# Altium PCB ChassisPowerDistroA_PSoC_1.0_GK.PcbDoc (part 2 of 2)
Units mil, origin at the board's own origin, x right, y up, seen from the top; angles counter-clockwise.
Board outline 6000 x 4000 mil, 4 copper layers (Top Layer, Int1 (GND), Int2 (PWR), Bottom Layer), stack 53.912 mil thick; 194 components, 92 nets, 571 pads, 130 vias.
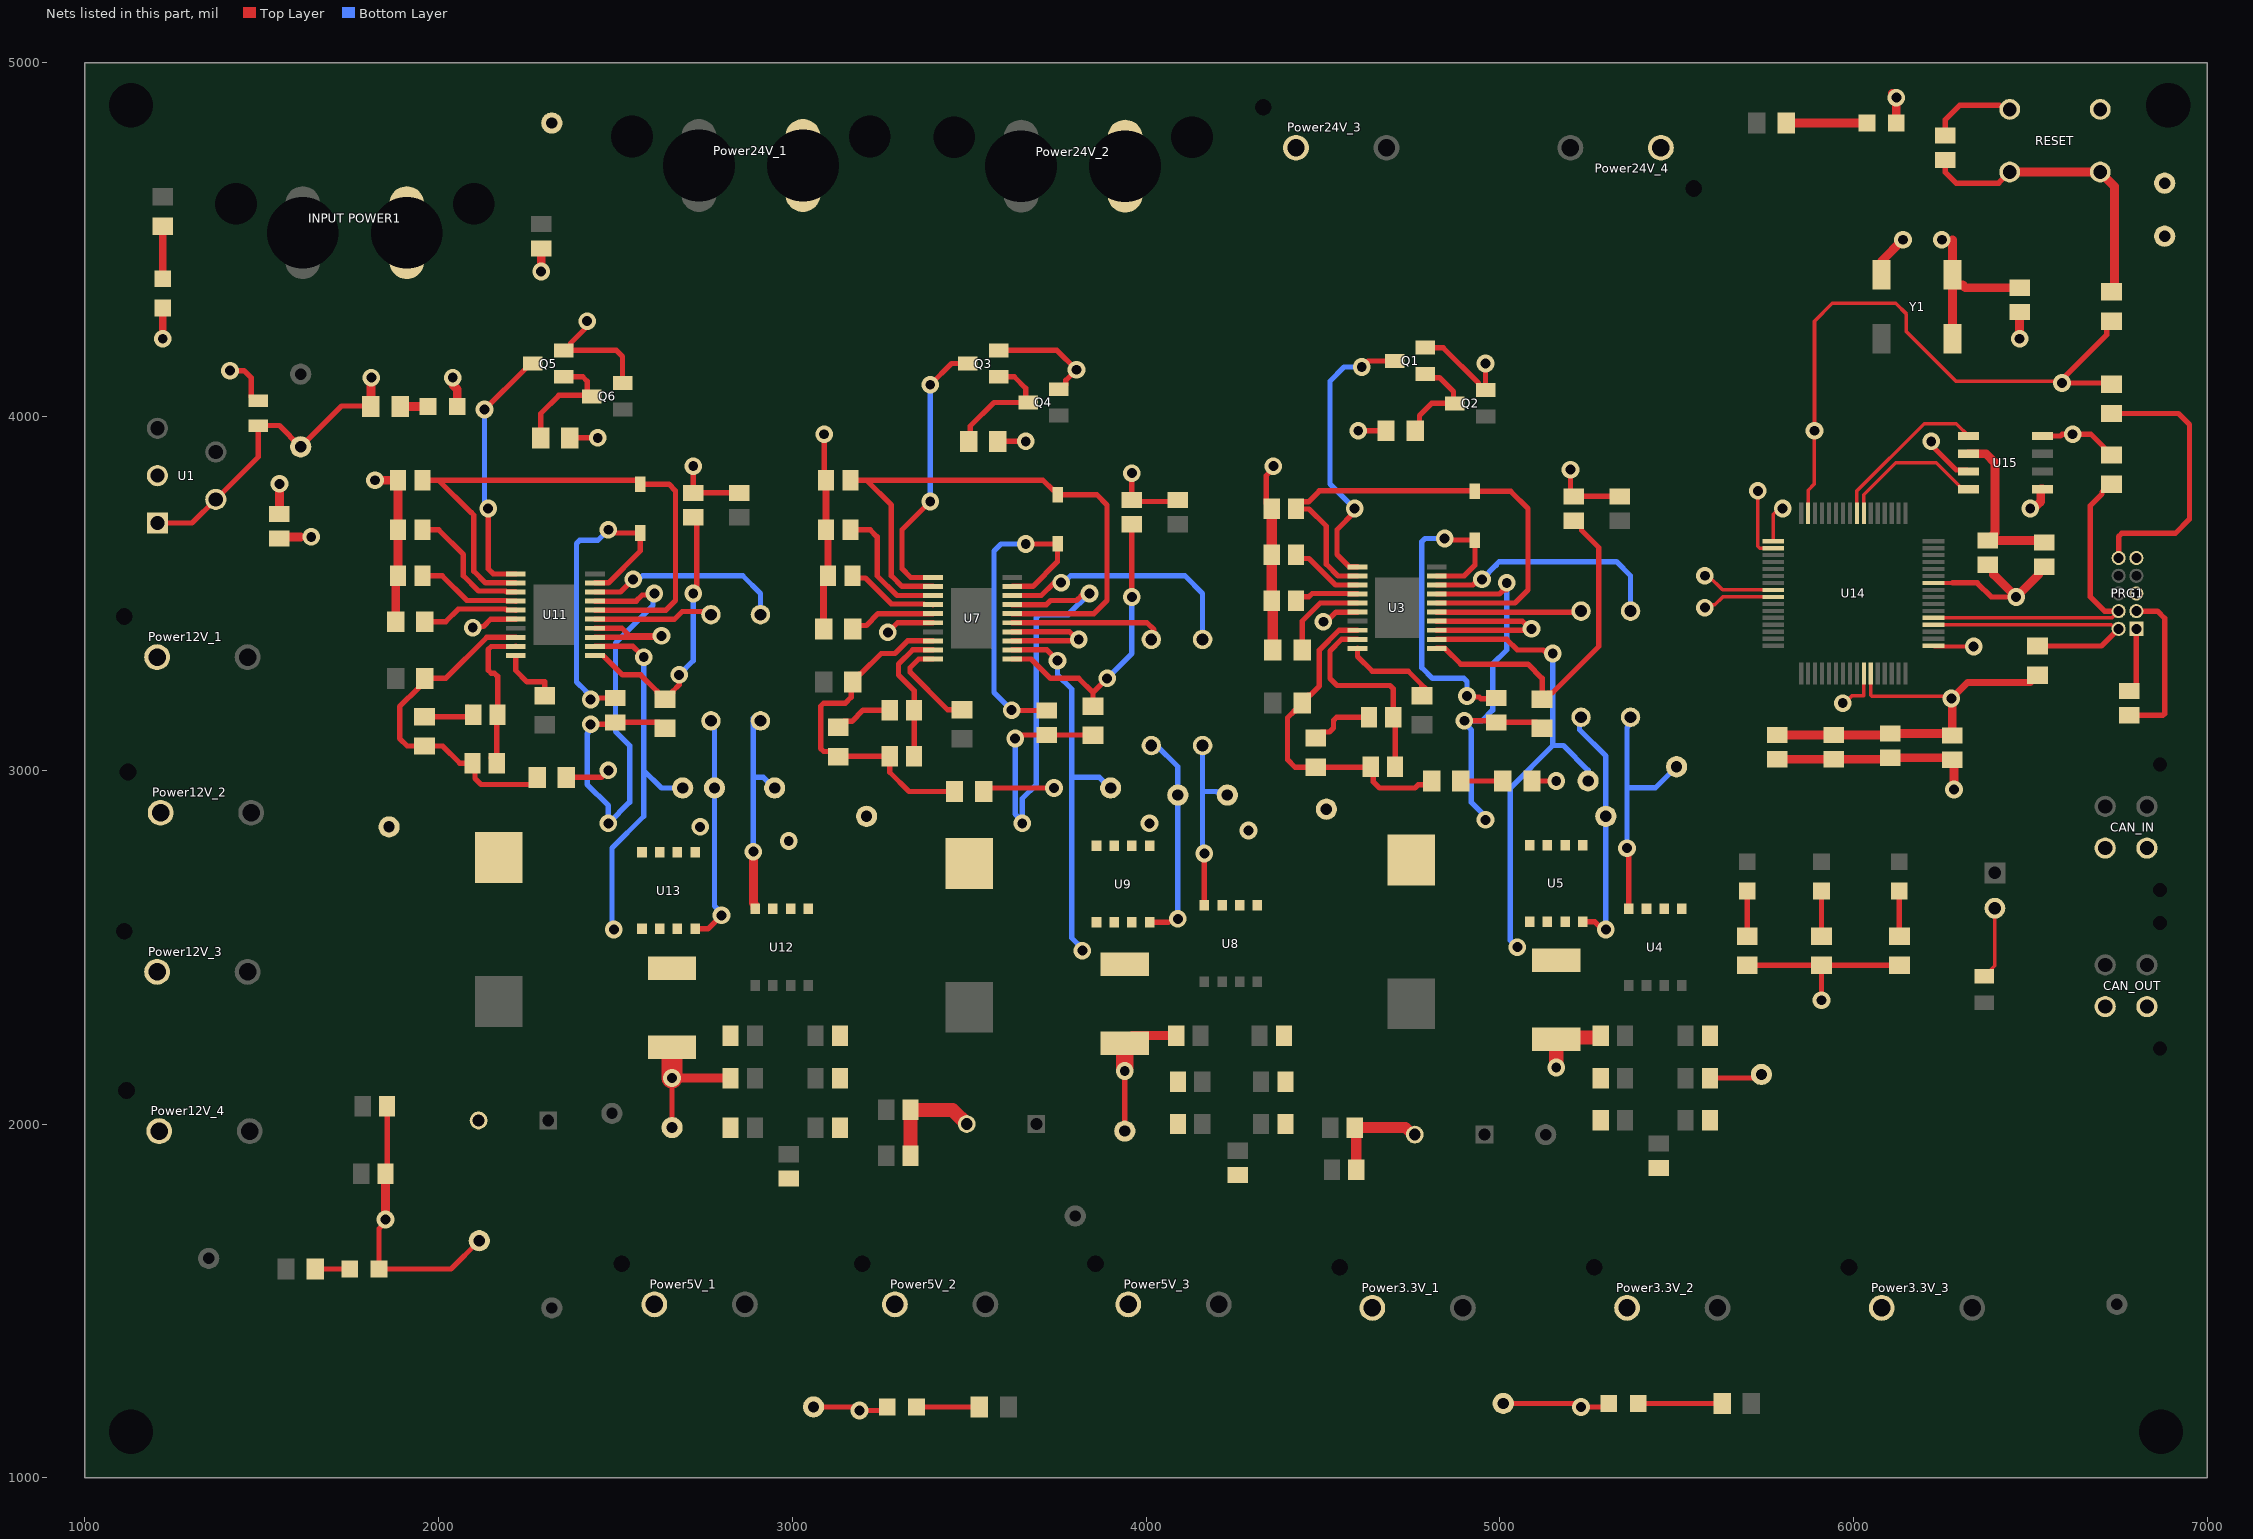
[diagram p4: the nets of this part, all layers, seen from the top]

## Via types
v1: diameter 50, hole 28, Top Layer to Bottom Layer, 130 vias

## Nets (pads, with @x,y where several pads share a name; then routed paths per layer and width w, separated by ;. In a path a pad name is that pad's centre, name@x,y a point inside that pad or via, vN(x,y) a via of type N, cw(c..) or ccw(c..) an arc to the next point about the centre after c; other vN are vias at no path point) (continued)
GND: 3.3V_Power.NEG 5V_Power.NEG 12V_Power.NEG 24V_OUT.NEG "INPUT POWER1.2" C1.1 C2.1 C4.1 C5.1 C6.1 C7.1 C8.1 C9.1 C10.1 C11.2 C12.1 C13.1 C14.1 C15.1 C16.1 C17.1 C20.1 C22.1 C23.1 C24.1 C25.1 C26.1 C27.1 C28.1 C29.2 C30.1 C31.1 C32.1 C33.1 C34.1 C35.1 C38.1 C40.1 C41.1 C42.1 C43.1 C44.1 C45.1 C46.1 C47.2 C48.1 C49.1 C50.1 C51.1 C52.1 C53.1 C56.2 C57.2 C58.2 C59.2 C60.1 C65.1 C66.1 C67.1 CAN_IN.1 CAN_OUT.1 GND.1 IN_P.NEG LP.NEG Power3.3V_1.2 Power3.3V_2.2 Power3.3V_3.2 Power5V_1.2 Power5V_2.2 Power5V_3.2 Power12V_1.2 Power12V_2.2 Power12V_3.2 Power12V_4.2 Power24V_1.2 Power24V_2.2 Power24V_3.2 Power24V_4.2 PRG1.3 PRG1.5 PRG1.9 Q1.2 Q2.2 Q3.2 Q4.2 Q5.2 Q6.2 R8.1 R10.1 R11.1 R19.1 R21.1 R22.1 R30.1 R32.1 R33.1 R44.2 RESET.1 RESET.2 TP10.1 TP11.1 TP21.1 TP22.1 TP32.1 TP33.1 TP37.1 U1.3 U3.6 U3.13 U3.14 U7.6 U7.13 U7.14 U11.6 U11.13 U11.14 U14.10 U14.17 U14.49 U14.57 U15.8 Y1.2 | length 10947.1
  Top Layer w5: v1(5580,3460) v1@5587.98,3467.98 ; U14.17@6226.38,3352.36 U14.17@6228.74,3350 ; RESET.1@6431.72,4878.91 RESET.1@6442.05,4868.58 ; 6875.55,3155.55 6880,3160
  Top Layer w10: v1@5587.98,3467.98 5607.98,3467.98 5630.16,3490.16 U14.57@5773.62,3490.16 ; U14.49@5773.62,3647.64 5773.62,3723.62 5800,3750 v1(5800,3740) ; v1(5970,3190) 5975.39,3190 5995.86,3210.47 6029.53,3210.47 U14.10@6029.53,3273.62 ; U14.17@6228.74,3350 v1(6340,3350)
  Top Layer w15: v1(1850,1730) 1850,1722.37 1831.34,1703.71 12V_Power.NEG@1831.34,1590 2035,1590 TP22.1@2115,1670 ; C49.1@1850,1860 1854.45,1864.45 C48.1@1854.45,2030 ; v1(2096.65,3403.35) 2093.3,3406.7 2126.7,3406.7 2147.2,3427.2 U11.6@2218,3427.2 ; Q5.2@2353.31,4187.4 Q5.2@2361.18,4187.4 ; R30.1@2361.34,2980 2460,2980 v1(2480,3000) ; v1(2420,4270) 2420,4254.09 2373.37,4207.46 2373.37,4199.59 Q5.2@2361.18,4187.4 ; U11.13@2442,3376.02 v1@2626.02,3376.02 ; U11.14@2442,3401.61 2518.39,3401.61 2540,3380 v1(2630,3380) ; Q6.2@2520,4094.8 2520,4170 2502.6,4187.4 Q5.2@2361.18,4187.4 ; TP32.1@2660,1990 v1(2660,2130) ; C50.1@2720,3784.45 v1(2720,3860) ; C50.1@2730,3784.45 C53.1@2850,3784.45 C53.1@2860,3784.45 ; TP11.1@3060,1200 3170.53,1200 3180.53,1190 v1(3190,1190) 3258.66,1190 5V_Power.NEG@3268.66,1200 ; C34.1@3088.66,3537.56 C34.1@3101.1,3550 ; v1(3090,3950) 3090,3825.55 C20.1@3095.55,3820 ; C33.1@3095.55,3680 C33.1@3101.1,3674.45 ; v1(3270,3390) 3297.2,3417.2 U7.6@3398,3417.2 ; R19.1@3541.34,2940 3551.34,2950 v1(3740,2950) ; Q3.2@3583.31,4187.4 3748.5,4187.4 v1(3803.31,4132.6) ; U7.13@3622,3366.02 3806.02,3366.02 v1(3810,3370) 3805.33,3370 3783.71,3391.61 U7.14@3622,3391.61 ; Q4.2@3753.31,4077.4 3761.18,4077.4 3773.37,4089.59 3773.37,4102.66 v1@3793.31,4122.6 ; TP21.1@3940,1980 v1(3940,2150) ; R22.1@3940,2228.54 R22.1@3961.46,2250 ; v1(3960,3840) C30.1@3960,3764.45 3964.45,3760 C35.1@4090,3760 ; C15.1@4355.55,3480 C15.1@4358.66,3476.89 ; C2.1@4355.55,3740 4340.22,3755.33 4340.22,3770.01 4340,3770.22 4340,3833.71 4360,3853.71 v1(4360,3860) ; v1(4501.56,3420) 4503.11,3420 4510,3426.89 4513.59,3423.3 4537.49,3447.2 U3.6@4598,3447.2 ; C13.1@4590,1990 C13.1@4594.45,1985.55 ; C11.2@4753.61,1970 C11.2@4760,1970 ; Q1.2@4790,4194.8 4840,4194.8 4939.94,4094.86 4939.94,4086.99 4952.13,4074.8 Q2.2@4960,4074.8 v1@4960,4130 ; U3.13@4822,3396.02 5086.02,3396.02 v1(5090,3400) 5085.33,3400 5063.71,3421.61 U3.14@4822,3421.61 ; TP33.1@5010,1210 5210.53,1210 5220.53,1200 v1(5230,1200) 5298.66,1200 3.3V_Power.NEG@5308.66,1210 ; R8.1@5091.34,2970 v1(5160,2970) ; v1(5200,3850) 5200,3784.45 C12.1@5210,3774.45 C17.1@5340,3774.45 ; C10.1@5445.55,1880 C10.1@5450,1875.55 ; C8.1@5594.45,2130 5717.82,2130 5727.82,2140 TP10.1@5740,2140 ; C67.1@6260,4794.45 6260,4840 6300,4880 6412.13,4880 ; U15.8@6534.33,3945 6585,3945 6590,3950 v1(6620,3950) 6671.34,3950 6707.97,3913.37 6707.97,3908.44 6725.08,3891.34 R44.2@6730,3891.34 ; C65.1@6780,3155.55 6875.55,3155.55 ; PRG1.3@6800,3450 6860,3450 6880,3430 6880,3160
  Top Layer w20: v1(1220,4220) IN_P.NEG@1220,4307.32 ; R21.1@3088.66,3400 C34.1@3088.66,3537.56 ; C33.1@3095.55,3680 C20.1@3095.55,3820 ; C34.1@3101.1,3550 C33.1@3101.1,3674.45
  Top Layer w25: C1.1@1550,3724.45 v1@1550,3790 ; v1(1820,3820) C38.1@1885.55,3820 C51.1@1885.55,3680 C52.1@1885.55,3550 1878.66,3543.11 R33.1@1878.66,3420 ; v1(1850,1730) C49.1@1850,1860 ; v1(2040,4110) 2040,4090 2052.68,4077.32 LP.NEG@2052.68,4028.66 ; v1(2290,4410) C66.1@2290,4475.55 ; v1@2626.02,3376.02 v1(2630,3380) ; v1(2660,2130) C41.1@2825.55,2130 ; R22.1@3961.46,2250 C22.1@4085.55,2250 ; C59.2@5784.45,3031.1 C58.2@5944.45,3031.1 6100,3031.1 C57.2@6104.45,3035.55 6273.66,3035.55 C56.2@6279.45,3029.76 6274.45,3024.76 6284.45,3014.76 v1(6284.45,2945.55) ; Y1.2@6080,4401.1 6080,4440 v1(6140,4500) ; v1@6110,4913.24 v1(6121.34,4901.9) 24V_OUT.NEG@6121.34,4830 ; v1(6470,4220) C60.1@6470,4295.55
  Top Layer w30: C15.1@4355.55,3480 C16.1@4355.55,3610 C2.1@4355.55,3740 ; R10.1@4358.66,3340 C15.1@4358.66,3476.89 ; C13.1@4590,1990 4733.61,1990 C11.2@4753.61,1970 ; C14.1@4594.45,1870 C13.1@4594.45,1985.55
  Top Layer w40: C32.1@3334.45,1910 C31.1@3334.45,2040 3453.15,2040 C29.2@3493.15,2000 ; v1@5160,2170 R11.1@5160,2240 5165,2245 5282.72,2245 5285.55,2247.83 C4.1@5285.55,2250
  Top Layer w50: v1@3940,2159.67 R22.1@3940,2228.54
  Top Layer w60: v1(2660,2130) R32.1@2660,2217.09
  other v1: 5160,2160 1550,3810 4960,4150
Net3.3V_Power_POS: 3.3V_Power.POS R13.1 | length 237.3
  Top Layer w15: 3.3V_Power.POS@5391.34,1210 R13.1@5628.66,1210
Net5V_OUT_1: 5V_OUT.1 C1.2 F?.2 R1.2 U1.1 U1.2 | length 986.9
  Top Layer w15: U1.1@1205,3699 1303,3699 U1.2@1370,3766 1490,3886 F?.2@1490,3974.75 1549.86,3974.75 5V_OUT.1@1610,3914.61 1725.39,4030 1807.32,4030 R1.2@1808.66,4028.66
  Top Layer w25: C1.2@1550,3655.55 1554.45,3660 1610,3660 ; R1.2@1808.66,4028.66 1808.66,4108.66 v1(1810,4110)
  other v1: 1640,3660
Net5V_Power_POS: 5V_Power.POS R24.1 | length 177.3
  Top Layer w15: 5V_Power.POS@3351.34,1200 R24.1@3528.66,1200
Net12V_Power_POS: 12V_Power.POS R35.1 | length 97.3
  Top Layer w15: R35.1@1651.34,1590 12V_Power.POS@1748.66,1590
Net24V_OUT_POS: 24V_OUT.POS R36.1 | length 228.7
  Top Layer w25: R36.1@5810,4830 24V_OUT.POS@6038.66,4830
NetC2_2: C2.2 U2.2 U3.2 U3.16 | length 1517.9
  Top Layer w15: U3.2@4598,3549.57 4542.96,3549.57 4510,3582.53 4510,3690 4461,3739 4425.45,3739 C2.2@4424.45,3740 4424.45,3743.69 4439.78,3759.02 4459.02,3759.02 4490,3790 4929,3790 U2.2@4930,3789 5031,3789 5080,3740 5080,3510 5042.8,3472.8 U3.16@4822,3472.8
NetC3_1: C3.1 L1.2 R5.2 TP7.1 U3.17 U4.1 U4.2 U4.3 U5.5 U5.6 U5.7 U5.8 | length 1225.2
  Top Layer w15: U3.17@4822,3498.39 4998.91,3498.39 5010.53,3510 5019.5,3510 5020,3510.5 v1(5020,3530) ; v1(4900,3140) 4985.55,3140 C3.1@4990,3135.55 5103.11,3135.55 R5.2@5120,3118.66
  Bottom Layer w15: v1(4960,2860) 4960,2869.47 4920,2909.47 4920,3113.71 4900,3133.71 v1(4900,3140) 4950,3140 4980,3170 4980,3300 5020,3340 v1(5020,3530)
NetC3_2: C3.2 U2.1 U3.19 | length 981.7
  Top Layer w15: U3.19@4822,3549.57 4899.57,3549.57 4930,3580 U2.1@4930,3651 4849,3651 v1(4844.5,3655.5) v1@4840,3660 ; v1(4907.5,3210) 4910.1,3207.4 4942.07,3207.4 4947.35,3202.12 4987.67,3202.12 C3.2@4990,3204.45
  Bottom Layer w15: v1(4844.5,3655.5) 4788.79,3655.5 4780,3646.71 4780,3290 4810,3260 4898.71,3260 4907.5,3251.21 v1(4907.5,3210)
NetC12_2: C12.2 R5.1 U3.11 | length 1001.5
  Top Layer w15: U3.11@4822,3344.84 4845.16,3344.84 4890,3300 5080,3300 5120,3260 R5.1@5120,3201.34 5137.11,3218.44 5148.44,3218.44 5280,3350 5280,3630 5231.44,3678.56 5231.44,3690.22 5216.1,3705.55 C12.2@5210,3705.55
NetC15_2: C15.2 U3.4 | length 182.5
  Top Layer w15: C15.2@4424.45,3480 4435.45,3491 4461,3491 4470,3500 4571.29,3500 4572.4,3498.89 4597.5,3498.89 U3.4@4598,3498.39
NetC16_2: C16.2 U3.3 | length 209.2
  Top Layer w15: C16.2@4424.45,3610 4435.45,3599 4461,3599 4536.02,3523.98 U3.3@4598,3523.98
NetC18_1: C18.1 R6.1 R7.2 R12.1 U3.8 | length 979.1
  Top Layer w15: R12.1@4502.03,2991.56 R12.1@4484.92,3008.66 ; U3.8@4598,3396.02 4546.02,3396.02 4490,3340 4490,3238.66 4463.37,3212.03 4458.44,3212.03 4441.34,3194.92 R6.1@4441.34,3190 4441.34,3185.08 4424.23,3167.97 4419.31,3167.97 4400,3148.66 4400,3030 4421.34,3008.66 R12.1@4480,3008.66 R12.1@4484.92,3008.66 ; R7.2@4807.32,2970 4796.33,2959 4769,2959 4760,2950 4660,2950 4642.65,2967.35 4642.65,3002.9 C18.1@4635.55,3010 4634.21,3008.66 R12.1@4484.92,3008.66
NetC18_2: C18.2 C19.2 U3.9 | length 597.4
  Top Layer w15: U3.9@4598,3370.43 4552.96,3370.43 4520,3337.47 4520,3260 4540,3240 4690.11,3240 4698.9,3231.21 4698.9,3171.44 4685.89,3171.44 4684.72,3170.28 4684.72,3151.16 C19.2@4683.56,3150 ; C19.2@4698.9,3150 4704.45,3144.45 C18.2@4704.45,3010
NetC19_1: C19.1 R12.2 | length 186.7
  Top Layer w15: R12.2@4480,3091.34 4497.11,3108.44 4518.44,3108.44 4530,3120 4530,3141.21 4538.79,3150 C19.1@4630,3150
NetC20_2: C20.2 U6.2 U7.2 U7.16 | length 1741.7
  Top Layer w15: C20.2@3164.45,3820 3210,3820 ; U7.2@3398,3519.57 3397.57,3520 3310,3520 3280,3550 3280,3750 3210,3820 ; U7.16@3622,3442.8 3852.8,3442.8 3890,3480 3890,3750 3861,3779 U6.2@3750,3779 3750,3786 3742.5,3793.5 3735.5,3793.5 3709,3820 3210,3820
NetC21_1: C21.1 L2.2 R17.2 TP18.1 U7.17 U8.1 U8.2 U8.3 U9.5 U9.6 U9.7 U9.8 | length 1474.1
  Top Layer w15: U7.17@3622,3468.39 3718.39,3468.39 3730,3480 3803.71,3480 3817.02,3493.3 3833.3,3493.3 v1(3840,3500) ; v1(3630,3090) 3640,3100 C21.1@3720,3100 3848.66,3100 R17.2@3850,3098.66
  Bottom Layer w15: v1(3630,3090) 3630,2876.29 v1@3650,2856.29 ; v1(3650,2850) v1@3650,2856.29 ; v1(3840,3500) 3780,3440 3698.79,3440 3690,3431.21 3690,2960 3650,2920 v1@3650,2856.29
  other v1: 4290,2830 4010,2850
NetC21_2: C21.2 U6.1 U7.19 | length 965.6
  Top Layer w15: v1@3620,3168.9 C21.2@3720,3168.9 ; U7.19@3622,3519.57 3622.43,3520 3680,3520 3750,3590 3750,3639 3749,3640 v1(3660,3640)
  Bottom Layer w15: v1(3620,3170) 3570,3220 3570,3620 3590,3640 v1(3660,3640)
NetC30_2: C30.2 R17.1 U7.11 | length 827.1
  Top Layer w15: U7.11@3622,3314.84 3675.16,3314.84 3730,3260 3810,3260 3850,3220 ; R17.1@3850,3181.34 3850,3220 ; v1(3890,3260) 3850,3220 ; v1(3960,3490) C30.2@3960,3695.55
  Bottom Layer w15: v1(3890,3260) 3960,3330 v1(3960,3490)
NetC33_2: C33.2 U7.3 | length 375
  Top Layer w15: C33.2@3164.45,3680 3220,3680 3240,3660 3240,3550 3296.02,3493.98 U7.3@3398,3493.98
NetC34_2: C34.2 U7.4 | length 261.8
  Top Layer w15: C34.2@3170,3550 3176.55,3543.45 3206.55,3543.45 3280,3470 3371.29,3470 3372.4,3468.89 3397.5,3468.89 U7.4@3398,3468.39
NetC36_1: C36.1 R23.2 | length 165.7
  Top Layer w15: R23.2@3130,3121.34 3147.11,3138.44 3168.44,3138.44 3200,3170 C36.1@3275.55,3170
NetC36_2: C36.2 C37.2 U7.9 | length 393.2
  Top Layer w15: C37.2@3344.45,3040 C36.2@3344.45,3170 3344.45,3225.55 3300,3270 3300,3300 3340.43,3340.43 U7.9@3398,3340.43
NetC37_1: C37.1 R18.1 R19.2 R23.1 U7.8 | length 996.2
  Top Layer w15: U7.8@3398,3366.02 3326.02,3366.02 3290,3330 3251.34,3330 3193.37,3272.03 3188.44,3272.03 3166.76,3250.34 3166.76,3206.76 3150,3190 3088.79,3190 3080,3181.21 3080,3062.19 3088.79,3053.4 3115.26,3053.4 R23.1@3130,3038.66 3131.34,3040 C37.1@3275.55,3040 3275.55,2994.45 3330,2940 R19.2@3458.66,2940
NetC38_2: C38.2 U10.2 U11.2 U11.16 | length 1708.5
  Top Layer w15: C38.2@1954.45,3820 2000,3820 ; U11.2@2218,3529.57 2217.57,3530 2132.53,3530 2099.5,3563.03 2099.5,3721.71 2091.21,3730 2090,3730 2000,3820 ; U11.16@2442,3452.8 2642.8,3452.8 2670,3480 2670,3790 2651,3809 U10.2@2570,3809 2559,3820 2000,3820
NetC39_1: C39.1 L3.2 R28.2 TP29.1 U11.17 U12.1 U12.2 U12.3 U13.5 U13.6 U13.7 U13.8 | length 1422.2
  Top Layer w15: U11.17@2442,3478.39 2558.39,3478.39 2575.81,3495.81 v1@2605.81,3495.81 ; v1@2450,3130 2450.37,3130.37 C39.1@2494.82,3130.37 ; C39.1@2500,3135.55 2623.11,3135.55 R28.2@2640,3118.66
  Top Layer w25: C39.1@2494.82,3130.37 C39.1@2500,3135.55 ; v1@2605.81,3495.81 v1(2610,3500)
  Bottom Layer w15: v1(2430,3130) 2423.3,3123.3 2423.3,3107.02 2420,3103.71 2420,2960 2480,2900 v1(2480,2850) 2540,2910 2540,3070 2500,3110 2500,3360 2606.41,3466.41 2606.41,3496.41 v1(2610,3500)
  other v1: 2990,2800 2739.5,2840
NetC39_2: C39.2 U10.1 U11.19 | length 946.7
  Top Layer w15: v1(2430,3200) 2430,3190 2444.45,3204.45 C39.2@2500,3204.45 ; U11.19@2442,3529.57 2442.43,3530 2480,3530 2570,3620 U10.1@2570,3671 2491,3671 v1@2490,3670
  Bottom Layer w15: v1(2430,3200) 2430,3209.47 2416.41,3223.06 2416.41,3223.59 2390,3250 2390,3641.21 2398.79,3650 2450,3650 v1(2480,3680)
NetC50_2: C50.2 R28.1 U11.11 | length 802.3
  Top Layer w15: U11.11@2442,3324.84 2465.16,3324.84 2520,3270 2571.34,3270 2617.97,3223.37 2617.97,3218.44 2635.08,3201.34 R28.1@2640,3201.34 2644.92,3201.34 2662.03,3218.44 2662.03,3223.37 2680,3241.34 v1(2680,3270) ; v1@2730,3500 C50.2@2730,3715.55
  Bottom Layer w15: v1(2680,3270) 2720,3310 v1(2720,3500)
NetC51_2: C51.2 U11.3 | length 371.6
  Top Layer w15: C51.2@1954.45,3680 2000,3680 2070,3610 2070,3550 2113,3507 2189.88,3507 2192.4,3504.48 2217.5,3504.48 U11.3@2218,3503.98
NetC52_2: C52.2 U11.4 | length 293.2
  Top Layer w15: C52.2@1954.45,3550 2010,3550 2080,3480 2191.29,3480 2192.4,3478.89 2217.5,3478.89 U11.4@2218,3478.39
NetC54_1: C54.1 R34.2 | length 168.4
  Top Layer w15: R34.2@1960,3151.34 2091.85,3151.34 C54.1@2098.03,3157.52 2098.03,3163.62 C54.1@2082.7,3178.96
NetC54_2: C54.2 C55.2 U11.9 | length 442.3
  Top Layer w15: C55.2@2149.11,3035.33 C55.2@2164.45,3020 2164.45,3155.04 C54.2@2166.93,3157.52 2166.93,3265.58 2158.06,3274.45 2148.79,3274.45 2140,3283.24 2140,3341.21 2148.79,3350 2217.57,3350 U11.9@2218,3350.43
NetC55_1: C55.1 R29.1 R30.2 R34.1 U11.8 | length 994.4
  Top Layer w15: R34.1@1948.1,3056.76 R34.1@1960,3068.66 ; R29.1@1960,3258.66 1944.23,3242.89 1944.23,3234.23 1890,3180 1890,3090 1911.34,3068.66 R34.1@1960,3068.66 ; R29.1@1961.34,3260 2020,3260 2136.02,3376.02 U11.8@2218,3376.02 ; R30.2@2278.66,2980 2278.66,2977.11 2261.56,2960 2120,2960 2102.65,2977.35 2102.65,3012.9 C55.1@2095.55,3020 2060,3020 2011.34,3068.66 R34.1@1960,3068.66
  Top Layer w25: R29.1@1960,3258.66 R29.1@1961.34,3260
NetC61_1: C61.1 C62.1 U15.2 | length 472.7
  Top Layer w25: U15.2@6325.67,3895 6375,3895 6400,3870 6400,3670 6396.44,3666.44 6396.44,3660.33 C62.1@6386.1,3650 ; C62.1@6380,3650 C62.1@6386.1,3650 ; C61.1@6540,3644.45 6534.45,3650 C62.1@6386.1,3650
NetC67_2: C67.2 R38.1 RESET.3 RESET.4 | length 857.5
  Top Layer w5: R38.1@6730,4352.68 R38.1@6737.95,4360.63
  Top Layer w15: C67.2@6260,4725.55 6260,4690 6290,4660 6410.63,4660 RESET.3@6442.05,4691.42
  Top Layer w25: RESET.3@6442.05,4691.42 RESET.4@6697.95,4691.42 6737.95,4651.42 R38.1@6737.95,4360.63
NetFLT_3.3V_POS: FLT_3.3V.POS R39.1 | length 126
  Top Layer w15: R39.1@6130,2532.68 FLT_3.3V.POS@6130,2658.66
NetFLT_5V_POS: FLT_5V.POS R40.1 | length 127.3
  Top Layer w15: R40.1@5910,2531.34 FLT_5V.POS@5910,2658.66
NetFLT_12V_POS: FLT_12V.POS R41.1 | length 131.5
  Top Layer w15: FLT_12V.POS@5700,2658.66 5700,2541.34 R41.1@5710,2531.34
NetIN_P_POS: IN_P.POS R37.1 | length 148.7
  Top Layer w20: IN_P.POS@1220,4390 R37.1@1220,4538.66
NetLP_POS: LP.POS R1.1 | length 78.7
  Top Layer w25: R1.1@1891.34,4028.66 LP.POS@1970,4028.66
NetP1_2: P1.2 R42.1 | length 205
  Top Layer w10: R42.1@6370,2417.4 6400,2447.4 P1.2@6400,2610
NetPRG1_10: PRG1.10 R45.2 | length 781.7
  Top Layer w15: R45.2@6730,4008.66 6918.66,4008.66 6950,3977.32 6950,3710 6910,3670 6758.79,3670 6750,3661.21 PRG1.10@6750,3600
NetQ1_1: Q1.1 Q2.3 R2.1 | length 305.1
  Top Layer w10: Q1.1@4790,4120 Q1.1@4797.87,4120 ; Q2.3@4865.51,4037.4 Q2.3@4873.39,4037.4
  Top Layer w15: R2.1@4761.34,3960 4773.24,3971.9 4773.24,4003.24 4807.4,4037.4 Q2.3@4865.51,4037.4 ; Q1.1@4790,4120 4800,4110 4830,4110 4869.2,4070.8 4869.2,4041.59 Q2.3@4873.39,4037.4
NetQ3_1: Q3.1 Q4.3 R14.1 | length 366.9
  Top Layer w15: R14.1@3498.66,3930 3503.24,3934.58 3503.24,3973.24 3570,4040 Q4.3@3658.82,4040 ; Q3.1@3583.31,4112.6 3627.4,4112.6 3660,4080 3660,4041.18 Q4.3@3658.82,4040 ; Q4.3@3666.69,4040 Q4.3@3658.82,4040
NetQ5_1: Q5.1 Q6.3 R25.1 | length 350.4
  Top Layer w15: R25.1@2288.66,3940 2288.66,4008.66 2340,4060 Q6.3@2429.59,4060 ; Q5.1@2353.31,4112.6 2407.4,4112.6 2420,4100 2420,4069.59 Q6.3@2429.59,4060 ; Q6.3@2432.19,4057.4 Q6.3@2429.59,4060
NetR3_1: R3.1 U3.18 | length 692.6
  Top Layer w15: U3.18@4822,3523.98 4924.51,3523.98 4940.53,3540 v1(4950,3540)
  Bottom Layer w15: v1(4950,3540) 4990,3580 4990,3581.21 4998.79,3590 5330,3590 5370,3550 R3.1@5370,3450
NetR3_2: R3.2 TP3.1 U4.4 | length 712.5
  Top Layer w15: v1(5360,2780) 5365,2775 U4.4@5365,2608.37
  Bottom Layer w15: v1(5360,2780) 5360,2950.58 ; R3.2@5370,3150 5362.32,3142.32 5362.32,3123.48 5360,3121.15 5360,2950.58 ; TP3.1@5500,3010 5440.58,2950.58 5360,2950.58
NetR4_1: R4.1 U3.15 | length 409.2
  Top Layer w15: U3.15@4822,3447.2 5227.2,3447.2 R4.1@5230,3450
NetR4_2: R4.2 TP4.1 U5.4 | length 707.1
  Top Layer w15: U5.4@5235,2571.63 5268.9,2571.63 5290.53,2550 v1(5300,2550)
  Bottom Layer w15: R4.2@5220,3150 5225.4,3144.6 5225.4,3114.6 5300,3040 v1(5300,2550)
NetR7_1: R7.1 R8.2 | length 118.7
  Top Layer w15: R7.1@4890,2970 R8.2@5008.66,2970
NetR9_1: R9.1 U3.10 | length 292.1
  Top Layer w15: U3.10@4598,3344.84 4598,3322 4640,3280 4741.34,3280 4787.97,3233.37 4787.97,3228.44 4780,3236.42 R9.1@4780,3211.34 R9.1@4780,3210
NetR10_2: R10.2 U3.5 | length 259.3
  Top Layer w15: R10.2@4441.34,3340 4441.34,3421.34 4492.8,3472.8 U3.5@4598,3472.8
NetR11_2: R11.2 TP9.1 U3.12 U5.1 U5.2 U5.3 | length 1412.1
  Top Layer w15: U3.12@4822,3370.43 5019.57,3370.43 5050,3340 5123.71,3340 5127.02,3336.7 5143.3,3336.7 v1(5150,3330)
  Bottom Layer w15: v1@5049.39,2499.39 5030,2518.79 5030,2950 5150,3070 ; v1(5150,3330) 5150,3070 ; TP9.1@5250,2950 5250,3000 5180,3070 5150,3070
  other v1: 5050,2500
NetR15_1: R15.1 U7.18 | length 711.9
  Top Layer w15: U7.18@3622,3493.98 3703.98,3493.98 3740,3530 3759.5,3530 v1(3760,3530.5)
  Bottom Layer w15: v1(3760,3530.5) 3766.79,3530.5 3786.29,3550 4110,3550 4160,3500 R15.1@4160,3370
NetR15_2: R15.2 TP14.1 U8.4 | length 534.9
  Top Layer w15: U8.4@4165,2618.37 v1(4165,2765) v1@4170,2770
  Bottom Layer w15: R15.2@4160,3070 4160,2940 ; v1(4165,2765) 4160,2770 4160,2940 ; TP14.1@4230,2930 4221.39,2938.61 4200.1,2938.61 4198.71,2940 4160,2940
NetR16_1: R16.1 U7.15 | length 439.3
  Top Layer w15: U7.15@3622,3417.2 4002.8,3417.2 4022.32,3397.68 4022.32,3377.68 R16.1@4030,3370
NetR16_2: R16.2 TP15.1 U9.4 | length 583.2
  Top Layer w15: U9.4@4010,2570 4063.37,2570
  Bottom Layer w15: R16.2@4015,3070 4030,3070 4090,3010 TP15.1@4090,2930 4090,2920 v1(4090,2580)
NetR20_1: R20.1 U7.10 | length 279.7
  Top Layer w15: U7.10@3398,3314.84 3357.41,3314.84 3332.5,3289.93 3332.5,3277.5 3438.66,3171.34 R20.1@3480,3171.34
NetR21_2: R21.2 U7.5 | length 244.4
  Top Layer w15: R21.2@3171.34,3400 3181,3409.66 3209.66,3409.66 3242.8,3442.8 U7.5@3398,3442.8
NetR22_2: R22.2 TP20.1 U7.12 U9.1 U9.2 U9.3 | length 1112
  Top Layer w15: U7.12@3622,3340.43 3719.57,3340.43 v1(3750,3310)
  Bottom Layer w15: v1(3750,3310) 3750,3270 3790,3230 3790,2980 ; v1(3820,2490) 3820,2496.29 3790,2526.29 3790,2980 ; TP20.1@3900,2950 3898.71,2950 3868.71,2980 3790,2980
NetR26_1: R26.1 U11.18 | length 567.8
  Top Layer w15: U11.18@2442,3503.98 2513.98,3503.98 v1(2550,3540)
  Bottom Layer w15: v1(2550,3540) 2556.7,3546.7 2572.98,3546.7 2576.29,3550 2860,3550 2910,3500 R26.1@2910,3440
NetR26_2: R26.2 TP25.1 U12.4 | length 613.8
  Top Layer w25: v1(2890,2770) 2890,2624.19 2894,2620.19 2894,2609.37 U12.4@2895,2608.37
  Bottom Layer w15: v1(2890,2770) 2890,2980 ; R26.2@2890,3147.67 2890,2980 ; TP25.1@2950,2950 2948.71,2950 2918.71,2980 2890,2980
NetR27_1: R27.1 U11.15 | length 347
  Top Layer w15: U11.15@2442,3427.2 2667.2,3427.2 2689,3449 R27.1@2780,3449
NetR27_2: R27.2 TP26.1 U13.4 | length 649.2
  Top Layer w15: U13.4@2725,2551.63 2761.63,2551.63 v1(2800,2590)
  Bottom Layer w15: R27.2@2780,3140 2780,2616.29 2800,2596.29 v1(2800,2590)
NetR31_1: R31.1 U11.10 | length 176.8
  Top Layer w15: U11.10@2218,3324.84 2218,3282 2250,3250 2300,3250 R31.1@2300,3211.34
NetR32_2: R32.2 TP31.1 U11.12 U13.1 U13.2 U13.3 | length 1076.7
  Top Layer w15: U11.12@2442,3350.43 2549.57,3350.43 v1@2570,3330
  Bottom Layer w15: v1(2495.5,2550) 2490,2555.5 2490,2780 2580,2870 2580,3000 ; v1(2580,3320) 2580,3000 ; TP31.1@2690,2950 2630,2950 2580,3000
NetR33_2: R33.2 U11.5 | length 272.8
  Top Layer w15: R33.2@1961.34,3420 2020,3420 2055.89,3455.89 2189.81,3455.89 2192.4,3453.3 2217.5,3453.3 U11.5@2218,3452.8
RX: U14.39 U15.4 | length 417.8
  Top Layer w10: U14.39@6029.53,3726.38 6029.53,3779.53 6120,3870 6234.07,3870 6309.07,3795 U15.4@6325.67,3795
SWDCLK: PRG1.4 R44.1 U14.21 | length 974.4
  Top Layer w5: 6702.97,3781.63 R44.1@6702.97,3786.56 ; R44.1@6725.08,3808.66 R44.1@6730,3808.66
  Top Layer w10: U14.21@6226.38,3431.1 6731.1,3431.1 PRG1.4@6750,3450
  Top Layer w15: 6702.97,3781.63 6670,3748.66 6670,3490 6710,3450 PRG1.4@6750,3450 ; R44.1@6702.97,3786.56 R44.1@6725.08,3808.66
SWDIO: PRG1.2 R43.2 U14.20 | length 780.5
  Top Layer w5: U14.20@6226.38,3411.42 U14.20@6227.8,3410 ; PRG1.2@6740.53,3400 PRG1.2@6750,3400
  Top Layer w10: U14.20@6226.38,3411.42 6729.11,3411.42 PRG1.2@6740.53,3400
  Top Layer w15: R43.2@6520,3351.34 6701.34,3351.34 6745.26,3395.26 PRG1.2@6750,3400
TX: U14.40 U15.1 | length 472.6
  Top Layer w10: U14.40@6009.84,3726.38 6009.84,3789.84 6200,3980 6290.67,3980 U15.1@6325.67,3945
UVLO_3.3V: Q1.3 U3.1 | length 819.3
  Top Layer w15: v1(4590,3740) 4590,3730 4540,3680 4540,3610 4574.84,3575.16 U3.1@4598,3575.16 ; v1(4610,4140) 4627.4,4157.4 Q1.3@4703.39,4157.4
  Bottom Layer w15: v1(4590,3740) 4520,3810 4520,4100 4560,4140 v1(4610,4140)
UVLO_5V: Q3.3 U7.1 | length 783
  Top Layer w15: v1(3390,3760) 3310,3680 3310,3570 3334.84,3545.16 U7.1@3398,3545.16 ; v1(3390,4090) 3450,4150 Q3.3@3496.69,4150
  Bottom Layer w15: v1(3390,3760) v1(3390,4090)
UVLO_12V: Q5.3 U11.1 | length 729.5
  Top Layer w15: v1(2130,4020) 2246.63,4136.63 2246.63,4137.81 2258.82,4150 Q5.3@2266.69,4150 ; v1(2140,3740) 2140,3570 2150.01,3559.99 2154.84,3555.16 U11.1@2218,3555.16
  Bottom Layer w15: v1(2130,4020) 2130,3750 v1(2140,3740)
VCC: C56.1 C57.1 C58.1 C59.1 C60.2 C61.2 C62.2 C65.2 CAN_IN.2 CAN_OUT.2 F?.1 PRG1.1 R2.2 R14.2 R25.2 R39.2 R40.2 R41.2 R43.1 TP36.1 U14.11 U14.26 U14.50 U14.56 U15.3 U15.5 Y1.1 Y1.4 | length 3855.1
  Top Layer w5: v1(5580,3550) v1@5590,3550 ; U14.56@5773.46,3510 U14.56@5773.62,3509.84 ; R39.2@6128.66,2447.32 R39.2@6130,2448.66 ; v1@6270,3210 v1(6276.95,3203.05) ; 6279.53,3529.53 6280,3530
  Top Layer w10: v1@5590,3550 5630,3510 U14.56@5773.46,3510 ; v1(5730,3790) 5730,3633.81 5735.86,3627.95 U14.50@5773.62,3627.95 ; U14.11@6049.21,3273.62 6049.21,3212.93 6052.14,3210 v1@6270,3210 ; U14.26@6226.38,3529.53 6279.53,3529.53
  Top Layer w15: v1(1410,4130) 1450,4130 1470,4110 1470,4055.5 1480.25,4045.25 F?.1@1490,4045.25 ; R25.2@2371.34,3940 v1(2450,3940) ; R14.2@3581.34,3930 v1(3660,3930) ; v1(4600,3960) R2.2@4678.66,3960 ; R41.2@5700,2448.66 R40.2@5910,2448.66 ; v1(5910,2350) R40.2@5910,2448.66 ; R39.2@6128.66,2448.66 R40.2@5910,2448.66 ; v1(6220,3930) 6226.7,3923.3 6226.7,3913.3 6290.69,3849.31 6321.36,3849.31 U15.3@6325.67,3845 ; 6280,3530 6350,3530 6390,3490 v1(6460,3490) ; C65.2@6780,3224.45 6800,3244.45 PRG1.1@6800,3400
  Top Layer w20: v1(6276.95,3203.05) 6322.56,3248.66 6500,3248.66 R43.1@6520,3268.66
  Top Layer w25: C59.1@5784.45,3100 C58.1@5944.45,3100 6100,3100 C57.1@6104.45,3104.45 6273.66,3104.45 C56.1@6279.45,3098.66 6279.45,3200.55 v1(6276.95,3203.05) ; Y1.4@6280,4220 Y1.1@6280,4385.35 ; 6280,4500 Y1.1@6280,4401.1 Y1.1@6280,4385.35 ; C62.2@6380,3581.1 6386.1,3581.1 6396.44,3570.77 6396.44,3553.56 v1(6460,3490) 6523.56,3553.56 6523.56,3565.22 6533.9,3575.55 C61.2@6540,3575.55 ; C60.2@6470,4364.45 6316.65,4364.45 6308.84,4372.26 6293.09,4372.26 Y1.1@6280,4385.35 ; v1@6520,3750 6529.64,3759.64 6529.64,3794.31 6530.33,3795 U15.5@6534.33,3795
  other v1: 6500,3740 6250,4500
XRES: R38.2 R45.1 U14.47 | length 1773.8
  Top Layer w10: U14.47@5872.05,3726.38 5872.05,3792.05 5889.5,3809.5 5889.5,3959.5 v1(5890,3960) 5890,4270 5940,4320 6120,4320 6150,4290 6150,4240 6290,4100 6585,4100 v1(6590,4095) ; R38.2@6726.25,4266.25 R38.2@6730,4270
  Top Layer w15: R38.2@6726.25,4266.25 6716.68,4256.68 6716.68,4231.68 6596.7,4111.7 6596.7,4101.7 v1(6590,4095) 6726.34,4095 R45.1@6730,4091.34
  Bottom Layer w10: v1(6590,4095) v1@6590,4100
pads on no net: "INPUT POWER1." CAN_IN. CAN_IN.7 CAN_OUT. CAN_OUT.7 Power3.3V_1.9 Power3.3V_2.9 Power3.3V_3.9 Power5V_1.9 Power5V_2.9 Power5V_3.9 Power12V_1.9 Power12V_2.9 Power12V_3.9 Power12V_4.9 Power24V_1. Power24V_2. Power24V_3.9 Power24V_4.9 PRG1.6 PRG1.7 PRG1.8 U1.4 U3.7 U3.21 U7.7 U7.21 U11.7 U11.21 U14.1 U14.2 U14.3 U14.4 U14.5 U14.6 U14.7 U14.8 U14.9 U14.12 U14.13 U14.14 U14.15 U14.16 U14.18 U14.19 U14.22 U14.23 U14.24 U14.25 U14.27 U14.28 U14.29 U14.30 U14.34 U14.35 U14.36 U14.37 U14.38 U14.41 U14.42 U14.43 U14.44 U14.46 U14.48 U14.51 U14.52 U14.58 U14.59 U14.60 U14.64

## Polygon pours and split planes (outlines as drawn)
NetC39_1 on Top Layer "NETC39_1_L01_P021" (solid, pour order 21): 1810,2880 3080,2880 3080,2590 1810,2590
+3.3 on Top Layer "+3.3_L01_P056" (solid, pour order 56): 5010,2020 5180,2020 5180,1920 5010,1920
+12 on Top Layer "+12_L01_P055" (solid, pour order 55): 2430,2080 2530,2080 2530,1970 2430,1970
+24V_Input on Top Layer "+24V_INPUT_L01_P054" (solid, pour order 54): 1050,4700 1710,4700 1710,4050 1370,4050 1370,3870 1050,3870
Net5V_OUT_1 on Top Layer "NET5V_OUT_1_L01_P053" (solid, pour order 53): 1050,3830 1410,3830 1410,4000 1730,4000 1730,3610 1050,3610
+12 on Top Layer "+12_L01_P052" (solid, pour order 52): 1220,1800 1490,1800 1490,1560 1220,1560
+24V_Input on Top Layer "+24V_INPUT_L01_P012" (solid, pour order 12): 4120,4950 6635,4950 6635,4350 4120,4350
NetC3_1 on Top Layer "NETC3_1_L01_P041" (solid, pour order 41): 4460,2880 5500,2880 5500,2700 5560,2700 5560,2590 4460,2590
NetR11_2 on Top Layer "NETR11_2_L01_P040" (solid, pour order 40): 5030,2590 5280,2590 5280,2380 5030,2380
no net on Top Layer "NONET_L01_P045" (solid, pour order 45): 3200,2880
+3.3 on Top Layer "+3.3_L01_P039" (solid, pour order 39): 4470,2530 5010,2530 5010,1780 6860,1780 6860,1320 4470,1320
GND on Top Layer "GND_L01_P029" (solid, pour order 29): 4040,2350 4110,2350 4110,1880 4370,1880 4370,2350 4440,2350 4440,1810 4040,1810
+24V_Input on Top Layer "+24V_INPUT_L01_P028" (solid, pour order 28): 4130,2430 4350,2430 4350,1890 4130,1890
+24V_Input on Top Layer "+24V_INPUT_L01_P005" (solid, pour order 5): 3160,4950 3800,4950 3800,4350 3160,4350
GND on Top Layer "GND_L01_P038" (solid, pour order 38): 5240,2330 5300,2330 5300,1900 5560,1900 5560,2330 5640,2330 5640,1830 5240,1830
+24V_Input on Top Layer "+24V_INPUT_L01_P037" (solid, pour order 37): 5330,2420 5550,2420 5550,1920 5330,1920
+5 on Top Layer "+5_L01_P035" (solid, pour order 35): 3220,2520 3760,2520 3760,1770 4450,1770 4450,1320 2220,1320 2220,1770 3220,1770
no net on Top Layer "NONET_L01_P034" (solid, pour order 34): 3200,2510
NetR22_2 on Top Layer "NETR22_2_L01_P033" (solid, pour order 33): 3800,2590 4080,2590 4080,2370 3800,2370
NetC21_1 on Top Layer "NETC21_1_L01_P030" (solid, pour order 30): 3200,2880 4360,2880 4360,2600 3200,2600
+24V_Input on Top Layer "+24V_INPUT_L01_P026" (solid, pour order 26): 2860,2410 3100,2410 3100,1880 2860,1880
GND on Top Layer "GND_L01_P027" (solid, pour order 27): 2780,2300 2850,2300 2850,1870 3110,1870 3110,2360 3180,2360 3180,1800 2780,1800
+24V_Input on Top Layer "+24V_INPUT_L01_P008" (solid, pour order 8): 1710,4360 2200,4360 2200,4160 1710,4160
+12 on Top Layer "+12_L01_P018" (solid, pour order 18): 1050,3580 1790,3580 1790,3340 1920,3340 1920,3200 1790,3200 1790,2510 2430,2510 2430,1800 1050,1800
no net on Top Layer "NONET_L01_P025" (solid, pour order 25): 2860,2410
NetR32_2 on Top Layer "NETR32_2_L01_P024" (solid, pour order 24): 2460,2340 2840,2340 2840,2420 2460,2420
NetR32_2 on Top Layer "NETR32_2_L01_P023" (solid, pour order 23): 2460,2580 2840,2580 2840,2413.55 2460,2340
+24V_Input on Top Layer "+24V_INPUT_L01_P017" (solid, pour order 17): 2080,4950 2080,4700 1340,4700 1340,4950
no net on Top Layer "NONET_L01_P016" (solid, pour order 16): 1270,4970
+24V_Input on Top Layer "+24V_INPUT_L01_P015" (solid, pour order 15): 3740,4950 4220,4950 4220,4870 3740,4870
+24V_Input on Top Layer "+24V_INPUT_L01_P014" (solid, pour order 14): 3760,4520 4180,4520 4180,4350 3760,4350
no net on Top Layer "NONET_L01_P013" (solid, pour order 13): 3740,4520
+24V_Input on Top Layer "+24V_INPUT_L01_P010" (solid, pour order 10): 2860,4950 3230,4950 3230,4880 2860,4880
+24V_Input on Top Layer "+24V_INPUT_L01_P009" (solid, pour order 9): 1720,4760 2140,4760 2140,4690 1720,4690
no net on Top Layer "NONET_L01_P007" (solid, pour order 7): 1750,4330
+24V_Input on Top Layer "+24V_INPUT_L01_P006" (solid, pour order 6): 2840,4520 3200,4520 3200,4350 2840,4350
+24V_Input on Top Layer "+24V_INPUT_L01_P004" (solid, pour order 4): 2080,4950 2900,4950 2900,4350 2080,4350
NetC3_1 on Bottom Layer "NETC3_1_L04_P069" (solid, pour order 69): 4460,2880 5500,2880 5500,2700 5560,2700 5560,2595 4460,2595
NetR11_2 on Bottom Layer "NETR11_2_L04_P068" (solid, pour order 68): 5030,2380 5030,2590 5280,2590 5280,2380
+3.3 on Bottom Layer "+3.3_L04_P067" (solid, pour order 67): 4470,1325 4470,2530 5005,2530 5000,2525 5000,1780 6865,1780 6865,1325
+24V_Input on Bottom Layer "+24V_INPUT_L04_P064" (solid, pour order 64): 1050,4700 1710,4700 1710,4360 2195,4360 2200,4355 2200,4165 1710,4165 1710,4050 1370,4050 1370,3870 1055,3870 1050,3875
+24V_Input on Bottom Layer "+24V_INPUT_L04_P063" (solid, pour order 63): 1340,4950 2080,4950 2080,4690 1340,4690
+24V_Input on Bottom Layer "+24V_INPUT_L04_P062" (solid, pour order 62): 2905,4530 3159.61,4530 3160,4530.39 3160,4350 2905,4350
+24V_Input on Bottom Layer "+24V_INPUT_L04_P061" (solid, pour order 61): 2905,4950 3160,4950 3160,4880 2905,4880
+24V_Input on Bottom Layer "+24V_INPUT_L04_P060" (solid, pour order 60): 2080,4950 2905,4950 2905,4355 2080,4355
+24V_Input on Bottom Layer "+24V_INPUT_L04_P059" (solid, pour order 59): 3800,4530.39 4120,4530.39 4120,4350 3800,4350
+24V_Input on Bottom Layer "+24V_INPUT_L04_P058" (solid, pour order 58): 3800,4950 4120,4950 4120,4867.1 3802.9,4867.1 3800,4870
+24V_Input on Bottom Layer "+24V_INPUT_L04_P057" (solid, pour order 57): 3160,4950 3800,4950 3800,4350 3160,4350
NetC39_1 on Bottom Layer "NETC39_1_L04_P042" (solid, pour order 42): 1810,2880 3000,2880 3080,2800 3080,2590 1810,2590
NetC21_1 on Bottom Layer "NETC21_1_L04_P046" (solid, pour order 46): 3200,2880 4360,2880 4360,2600 3200,2600
+24V_Input on Bottom Layer "+24V_INPUT_L04_P051" (solid, pour order 51): 4120,4950 6635,4950 6635,4350 4130,4350 4120,4360
no net on Bottom Layer "NONET_L04_P050" (solid, pour order 50): 1340,4950
+5 on Bottom Layer "+5_L04_P048" (solid, pour order 48): 3220,2520 3760,2520 3760,1770 4450,1770 4450,1320 2450,1320 2450,1770 3220,1770
NetR22_2 on Bottom Layer "NETR22_2_L04_P047" (solid, pour order 47): 3800,2590 4080,2590 4080,2370 3800,2370
NetR32_2 on Bottom Layer "NETR32_2_L04_P044" (solid, pour order 44): 2460,2570 2840,2570 2840,2340 2460,2340
no net on Bottom Layer "NONET_L04_P043" (solid, pour order 43): 2460,2580
no net on Bottom Layer "NONET_L04_P032" (solid, pour order 32): 1810,2880
+12 on Bottom Layer "+12_L04_P019" (solid, pour order 19): 1050,3580 1790,3580 1790,3340 1920,3340 1920,3200 1790,3200 1790,2510 2430,2510 2430,1800 1050,1800
GND on Int1 (GND) (split plane): 6979.9,1020.1 1020.1,1020.1 1020.1,4979.9 6979.9,4979.9
VCC on Int2 (PWR) (split plane): 6979.9,1020.1 1020.1,1020.1 1020.1,4979.9 6979.9,4979.9

## Silkscreen, mask and mechanical layers (free items; w line width, h text height)
Top Overlay:
  drawing of 10 lines, arcs and shapes, not listed
  text "Chassis Power Distribution A" at 1258,1238 h50
  text "Rev 1.0" at 1258,1148 h50
  text "By: Gurtaranjit Kaur" at 1258,1059.66 h50

## Text inside footprints (layer, text, board x,y; h text height)
U1: Mechanical 13 "TAB" at 1127.5,3814.25 h25 r90
U2: Top Overlay "*" at 4950,3580 h50 r90; Mechanical 13 "*" at 4955,3662.5 h50 r90
U6: Top Overlay "*" at 3770,3570 h50 r90; Mechanical 13 "*" at 3775,3652.5 h50 r90
U10: Top Overlay "*" at 2600,3600 h50 r90; Mechanical 13 "*" at 2595,3682.5 h50 r90
U14: Top Overlay "16" at 6158.87,3202.35 h19.68 r90; Top Overlay "17" at 6294,3331 h19.68 r90; Top Overlay "32" at 6292,3638 h19.68 r90; Top Overlay "33" at 6160,3774 h19.68 r90; Top Overlay "48" at 5862,3773 h19.68 r90; Top Overlay "49" at 5728,3636 h19.68 r90; Top Overlay "64" at 5728,3335 h19.68 r90